# Altium PCB USB_Control.PcbDoc (part 2 of 2)
Units mil, origin at the board's own origin, x right, y up, seen from the top; angles counter-clockwise.
Board outline 3609 x 2250 mil, 4 copper layers (Component Side, Ground Plane, Power Plane, Solder Side), stack 26.634 mil thick; 208 components, 136 nets, 707 pads, 296 vias.
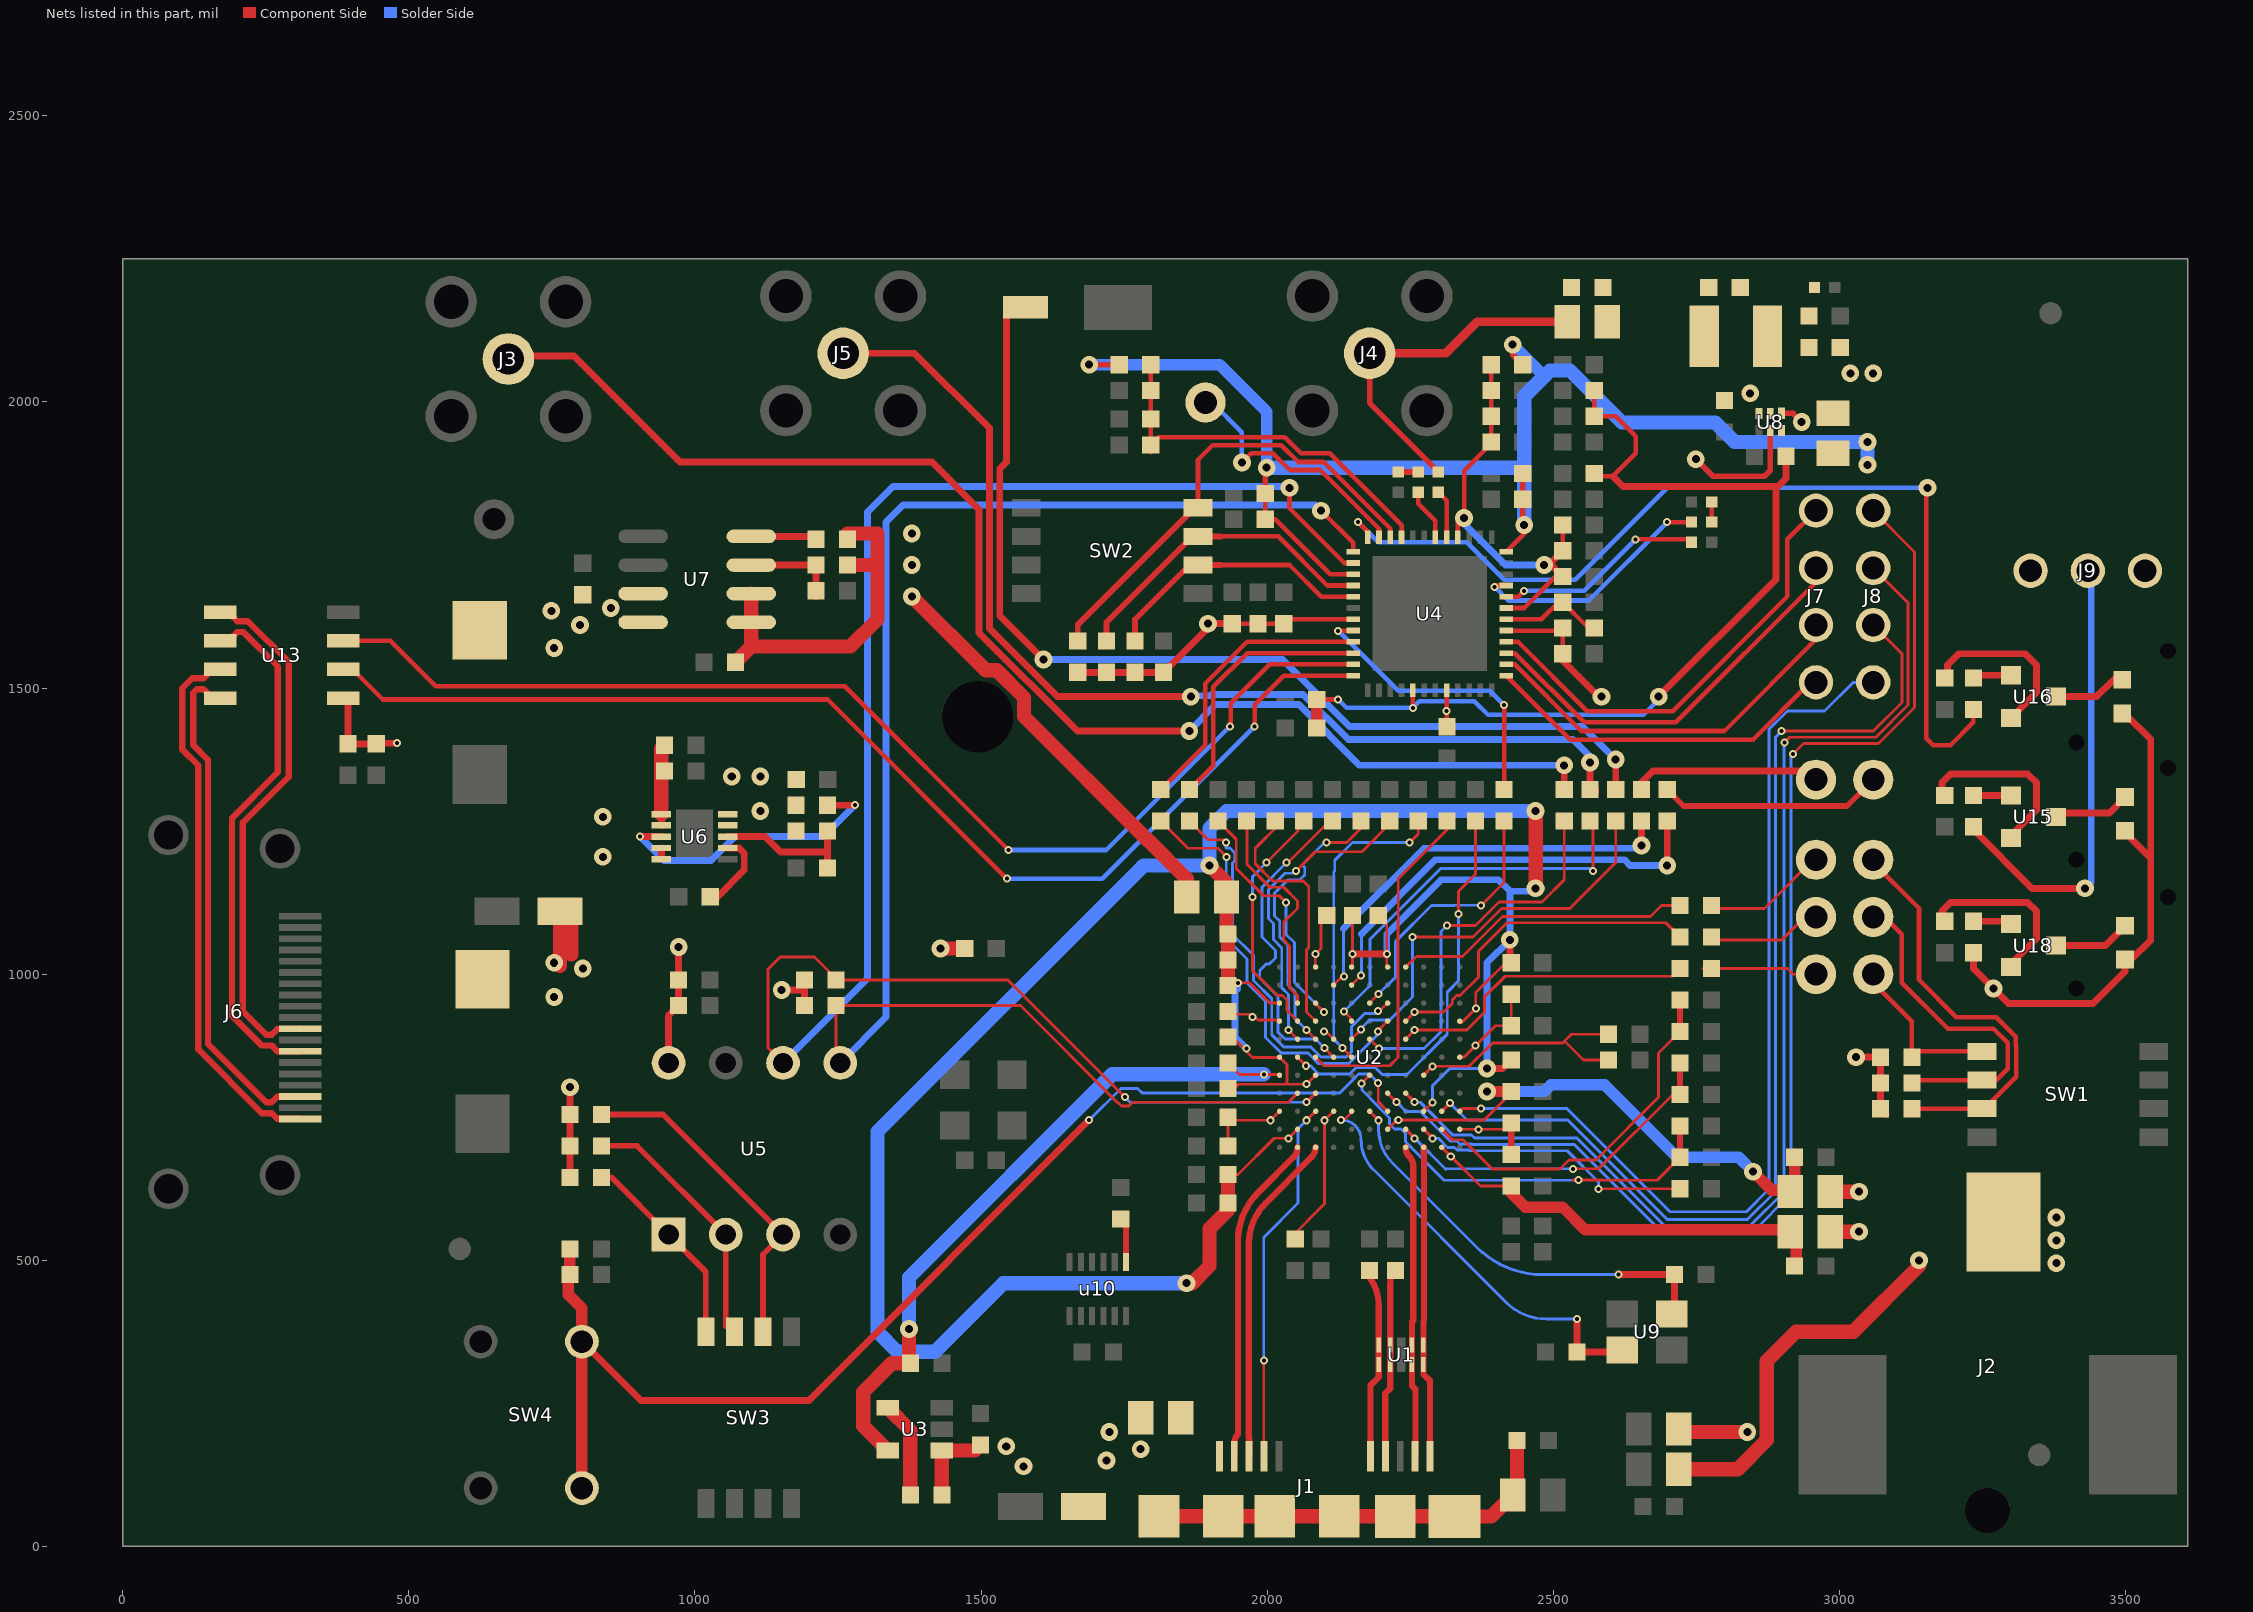
[diagram p4: the nets of this part, all layers, seen from the top]

## Via types
v1: diameter 31, hole 14, Component Side to Solder Side, tented both sides, 160 vias
v2: diameter 14, hole 7, Component Side to Solder Side, tented both sides, 109 vias
v3: diameter 14, hole 7, Component Side to Solder Side, 14 vias
v4: diameter 19.68, hole 7.87, Component Side to Solder Side, tented both sides, 13 vias

## Nets (pads, with @x,y where several pads share a name; then routed paths per layer and width w, separated by ;. In a path a pad name is that pad's centre, name@x,y a point inside that pad or via, vN(x,y) a via of type N, cw(c..) or ccw(c..) an arc to the next point about the centre after c; other vN are vias at no path point) (continued)
NetC1_1: C1.1 J1.11 L2.2 | length 726.3
  Component Side w25: J1.11@1811,52.75 J1.11@1923.5,52.75 J1.11@2013.5,52.75 J1.11@2126,52.75 J1.11@2326.5,52.75 ; J1.11@2327,52.25 2391.41,52.25 L2.2@2429.16,90 2436.5,97.34 C1.1@2436.5,180
NetC21_0: C21.0 U4.41 | length 84.5
  Component Side w8: C21.0@2299,1842.28 2313.53,1827.76 2313.53,1810.59 ; 2313.5,1789.44 2313.5,1810.56 ; U4.41@2313.53,1763.86 2313.53,1789.41
NetC21_1: C21.1 J4.1 L12.1 R56.0 | length 627.2
  Component Side w10: J4.1@2179,2085 2179,1997.96 2295.2,1881.76 C21.1@2303.04,1881.76
  Component Side w15: J4.1@2179,2085 2312,2085 2367,2140 L12.1@2524.16,2140
NetC22_0: C22.0 U4.42 | length 90.8
  Component Side w8: C22.0@2264,1842.28 2264,1822.28 2293.84,1792.44 U4.42@2293.84,1763.86
NetC22_1: C22.1 R34.0 | length 35
  Component Side w10: R34.0@2234,1877.72 C22.1@2269,1877.72
NetC26_0: C26.0 U4.32 | length 367.1
  Component Side w8: U4.32@2417.86,1659.53 2438.53,1659.53 v2(2449,1670) ; v2(2644,1760) 2736.28,1760 C26.0@2741.28,1755
  Solder Side w8: v2(2449,1670) 2554,1670 v2(2644,1760)
NetC27_0: C27.0 U4.33 | length 432
  Component Side w8: v2(2397.39,1676.82) 2399.79,1679.21 U4.33@2417.86,1679.21 ; v2(2699,1790) C27.0@2741.28,1790
  Solder Side w8: v2(2397.39,1676.82) 2421.21,1653 2562,1653 v2(2699,1790)
NetC27_1: C27.1 R35.0 | length 35
  Component Side w8: C27.1@2776.72,1790 R35.0@2776.72,1825
NetC73_1: C73.1 U6.7 | length 140.5
  Component Side w12: C73.1@1026.81,1135.31 1039.31,1135.31 1086.12,1182.12 1086.12,1211.43 1076.91,1220.63 U6.7@1057.38,1220.63
NetC76_0: C76.0 C77.0 L11.1 L13.2 R57.1
NetC78_1: C78.1 R58.0 SW4.2 U2.C5 | length 2165.4
  Component Side w5: v2(2194,810) 2194,777.01 U2.C5@2210.5,760.51
  Component Side w12: SW4.2@802.58,357.95 905.53,255 1199,255 v2(1689,745)
  Component Side w20: R58.0@779,472.5 779,440 802.58,416.42 SW4.2@802.58,357.95 SW4.2@802.58,102.05 ; R58.0@781.5,475 C78.1@781.5,520
  Solder Side w5: v2(1689,745) 1744.5,800.5 1773.5,800.5 1781.74,792.26 2126.81,792.26 2149.5,814.94 2149.5,815.42 2159.58,825.5 2178.5,825.5 v2(2194,810)
NetJ1_1: J1.1 L1.1
NetJ3_1: J3.1 R11.1 | length 2330.7
  Component Side w12: J3.1@689,2080 789,2080 974,1895 1414,1895 1496.63,1812.37 1496.63,1596.57 1668.2,1425 v1(1864,1425) ; R11.1@2519,1325 v1(2519,1365)
  Solder Side w12: v1(1864,1425) 1910,1471 2055.22,1471 2161.22,1365 v1(2519,1365)
NetJ5_1: J5.1 R15.1 | length 1872.2
  Component Side w12: J5.1@1259,2085 1384,2085 1514.63,1954.37 1514.63,1604.02 1633.65,1485 v1(1866.5,1485) ; v1(2564,1370) 2564,1332.5 2574,1322.5 R15.1@2574,1317.5
  Solder Side w12: v1(1866.5,1485) 1867.96,1486.46 1900,1486.46 1902.54,1489 2062.67,1489 2141.67,1410 2534,1410 2564,1380 v1(2564,1370)
NetJ6_1: J6.1 U13.7 | length 953
  Component Side w11: U13.7@170.72,1532.5 153.98,1532.5 147.67,1526.19 147.67,1523.44 141.23,1517 121.73,1517 104.16,1499.43 104.16,1392.65 132,1364.81 132,868.49 243.26,757.23 260.24,757.23 270.02,747.45 309.91,747.45 J6.1@310.32,747.05
NetJ6_3: J6.3 U13.8 | length 890
  Component Side w11: U13.8@170.72,1482.5 153.98,1482.5 147.67,1488.81 147.67,1491.56 141.23,1498 129.6,1498 123.16,1491.56 123.16,1400.52 149,1374.68 149,878.36 251.13,776.23 260.24,776.23 270.02,786.01 309.91,786.01 J6.3@310.32,786.42
NetJ6_7: J6.7 U13.6 | length 921.7
  Component Side w11: U13.6@170.72,1582.5 187.45,1582.5 193.76,1588.81 193.76,1591.56 200.2,1598 210.76,1598 271,1537.76 271,1352.79 191,1272.79 191,927.6 243.26,875.34 260.24,875.34 270.02,865.56 309.91,865.56 J6.7@310.32,865.16
NetJ6_9: J6.9 U13.5 | length 921.7
  Component Side w11: U13.5@170.72,1632.5 187.45,1632.5 193.76,1626.19 193.76,1623.44 200.2,1617 218.63,1617 290,1545.63 290,1344.92 210,1264.92 210,935.47 251.13,894.34 260.24,894.34 270.02,904.12 309.91,904.12 J6.9@310.32,904.53
NetJ7_1: J7.1 U4.28 | length 795.1
  Component Side w8: U4.28@2417.86,1580.79 2438.21,1580.79 2559.5,1459.5 2708.5,1459.5 2909,1660 2909,1760 J7.1@2959,1810
NetJ7_2: J7.2 U4.27 | length 717.8
  Component Side w8: U4.27@2417.86,1561.1 2432.9,1561.1 2554,1440 2714,1440 2959,1685 J7.2@2959,1710
NetJ7_3: J7.3 U4.26 | length 680.6
  Component Side w8: U4.26@2417.86,1541.42 2432.58,1541.42 2549,1425 2799,1425 2959,1585 J7.3@2959,1610
NetJ7_4: J7.4 U4.25 | length 646.5
  Component Side w8: U4.25@2417.86,1521.73 2529.59,1410 2849,1410 2947.27,1508.27 2947.27,1521.73 J7.4@2959,1510
NetJ8_1: J8.1 U2.D5 | length 2222.5
  Component Side w5: U2.D5@2210.5,792.01 v2(2226.24,776.26) ; v2(2919,1385) 2937,1403 3068.11,1403 3131,1465.89 3131,1738 J8.1@3059,1810
  Solder Side w5: v2(2226.24,776.26) 2226.69,776.26 2242.69,760.26 2267.28,760.26 2278.02,749.52 2278.5,749.52 2319.75,708.27 2331.71,708.27 2336.48,703.5 2357.04,703.5 2358.02,702.52 2536.48,702.52 2689.36,549.64 2848.64,549.64 2915.5,616.5 2915.5,1381.5 v2(2919,1385)
NetJ8_2: J8.2 U2.D4 | length 2075.3
  Component Side w5: U2.D4@2241.99,792.01 v2(2257.74,776.26) ; v2(2904,1405) 2913,1414 3063.56,1414 3120,1470.44 3120,1649 J8.2@3059,1710
  Solder Side w5: v2(2257.74,776.26) 2267.32,776.26 2273.5,770.08 2273.5,769.6 2282.58,760.52 2283.05,760.52 2324.3,719.27 2356.82,719.27 2362.58,713.52 2541.04,713.52 2693.91,560.64 2844.09,560.64 2903,619.56 2903,1404 v2(2904,1405)
NetJ8_3: J8.3 U2.C2 | length 1889.5
  Component Side w5: U2.C2@2304.98,760.51 2319,774.53 v2(2319,775) ; v2(2899,1425) 3059,1425 3109,1475 3109,1560 J8.3@3059,1610
  Solder Side w5: v2(2319,775) 2349,745 2525.11,745 2698.47,571.64 2839.53,571.64 2888,620.11 2888,1414 v2(2899,1425)
NetJ8_4: J8.4 U2.C1 | length 1652.7
  Component Side w5: U2.C1@2336.48,760.51 2340.97,765 v2(2374,765)
  Solder Side w5: v2(2374,765) 2524,765 2704,585 2837.33,585 2877,624.67 2877,1428 2909,1460 2974,1460 3024,1510 J8.4@3059,1510
NetJ9_2: J9.2 L11.2 R60.1 | length 804.3
  Component Side w12: R60.1@3234,1257.5 3234,1252.79 3336.79,1150 v1(3429,1150)
  Solder Side w12: v1(3429,1150) 3440,1161 3440,1699 J9.2@3434,1705
  other v1: 3019,2050 3059,2050
NetK1_1: K1.1 R3.1 SW1.1 | length 299.6
  Component Side w8: K1.1@3059,1000 3059,985 3126.5,917.5 R3.1@3126.5,855 3136.5,865 SW1.1@3249,865
NetK2_1: K2.1 R2.1 SW1.2 | length 574.6
  Component Side w5: R2.1@3126.5,810 R2.1@3131.5,815
  Component Side w8: K2.1@3079,1090 3089,1090 3109,1070 3109,985 3189,905 3269,905 3294,880 3294,835 3274,815 SW1.2@3249,815 R2.1@3131.5,815
NetK3_1: K3.1 R1.1 SW1.3 | length 749.3
  Component Side w8: K3.1@3059,1220 3059,1195 3139,1115 3139,990 3204,925 3274,925 3308,891 3308,876 3309,875 3309,820.9 3253.1,765 SW1.3@3249,765 R1.1@3126.5,765
NetL5_1: L5.1 U8.2
NetL12_2: L12.2 L13.1 R56.1 R57.0
NetR4_1: R4.1 U2.C8 | length 254.9
  Component Side w5: R4.1@2039,537.5 2100.26,598.76 v2(2100.26,744.76) U2.C8@2116.01,760.51
NetR5_1: R5.1 U2.B3 | length 498.1
  Component Side w5: U2.B3@2273.49,729.02 v2(2289.24,713.27) ; v2(2579,625) R5.1@2721.5,625
  Solder Side w5: v2(2289.24,713.27) 2299.2,713.27 2315.19,697.27 2327.15,697.27 2331.92,692.5 2352.48,692.5 2353.47,691.52 2524.4,691.52 2579,636.92 v2(2579,625)
NetR6_0: R6.0 U2.L4 | length 524
  Component Side w5: U2.L4@2241.99,1012.48 2260.69,1031.18 2341.3,1031.18 2411.11,1101 2670,1101 2689,1120 R6.0@2721.5,1120
NetR7_0: R7.0 U2.H4 | length 591
  Component Side w5: U2.H4@2241.99,917.99 v2(2257.74,933.74) 2307.94,933.74 2323.26,949.06 2323.26,954.97 2331,962.71 2336.91,962.71 2369,994.8 2369,1040 2419,1090 2696.5,1090 R7.0@2721.5,1065
NetR8_0: R8.0 U2.G4 | length 546.4
  Component Side w5: U2.G4@2241.99,886.5 v2(2257.74,902.24) 2348.64,902.24 2379.97,933.58 2379.97,960.49 2415.98,996.5 2708,996.5 R8.0@2721.5,1010
NetR9_0: R9.0 U2.H5 | length 754.9
  Component Side w5: R9.0@1814,1267.5 1861.5,1220 1914,1220 1928.5,1205.5 v2(1928.5,1205) v2@1929,1205 ; v2(2194,900) v2@2194,901.5 ; v2@2194,905 v2@2194,901.5 ; U2.H5@2210.5,917.99 v2@2194,901.5
  Solder Side w5: v2(1928.5,1205) 1928.5,1062.5 1964.5,1026.5 1964.5,984.97 1997,952.47 1997,889.48 2024.44,862.04 2071.5,862.04 2089.28,844.25 2142.73,844.25 2194,895.51 v2(2194,900)
NetR9_1: R9.1 U4.9 | length 506.1
  Component Side w8: R9.1@1814,1322.5 1892,1400.5 1892,1508 1964.79,1580.79 U4.9@2150.14,1580.79
NetR10_0: R10.0 U2.J5 | length 745.2
  Component Side w5: R10.0@1864,1267.5 1896.5,1235 1923,1235 v2(1928,1230) ; v2@2194,935 v2(2194,935.5) 2196.51,935.5 U2.J5@2210.5,949.49
  Solder Side w5: v2@1928,1235 v2(1928,1230) 1928,1220.5 1934.92,1220.5 1944,1211.42 1944,1198.58 1939.5,1194.08 1939.5,1069.5 1976,1032.99 1976,989.02 2008,957.03 2008,894.04 2029,873.04 2076.05,873.04 2093.84,855.25 2138.18,855.25 2147.26,864.33 2147.26,908.18 2170.08,931 2189.5,931 v2(2194,935.5)
NetR10_1: R10.1 U4.10 | length 465.6
  Component Side w8: R10.1@1864,1322.5 1906,1364.5 1906,1502.2 1964.9,1561.1 U4.10@2150.14,1561.1
NetR11_0: R11.0 U2.G6 | length 674
  Component Side w5: U2.G6@2179,886.5 v2(2195.5,870) ; v2(2314,1085) 2364,1085 2405,1126 2480,1126 2519,1165 R11.0@2519,1267.5
  Solder Side w5: v2(2195.5,870) 2274,870 2303.5,899.5 2303.5,1074.5 v2(2314,1085)
NetR12_0: R12.0 U2.D9 U4.2 U5.6 | length 3234.5
  Component Side w5: U5.6@1154,845 1127.5,871.5 1127.5,1008.5 1149,1030 1209,1030 1249,990 1546.52,990 v2(1751.52,785) ; v2(2068.76,776.26) U2.D9@2084.51,792.01
  Component Side w8: v1(2039,1850) 2039,1814 2134.42,1718.58 U4.2@2150.14,1718.58
  Solder Side w5: v2(1751.52,785) 1760.26,776.26 v2(2068.76,776.26)
  Solder Side w12: U5.6@1154,845 1301.5,992.5 1301.5,1807.5 1346.5,1852.5 2039,1852.5 2046.5,1852.5 2044,1850 v1(2039,1850)
NetR13_0: R13.0 U2.G7 | length 709.9
  Component Side w5: U2.G7@2147.5,886.5 v2(2164,903) v2@2164,905 ; v2(2254,1065) 2359.56,1065 2409.56,1115 2432.08,1115 2432.58,1114.5 2528.5,1114.5 2609,1195 R13.0@2609,1252.5
  Solder Side w5: v2@2164,905 2179,920 2214,920 2254,960 v2(2254,1065)
NetR13_1: pad.0 R13.1 | length 1778.9
  Component Side w12: pad.0@1551.5,2164.5 1544.63,2157.63 1544.63,1895.02 1532.63,1883.02 1532.63,1626.37 v1(1609,1550) ; R13.1@2609,1322.5 v1(2609,1375)
  Solder Side w12: v1(1609,1550) 2027.13,1550 2144.13,1433 2551,1433 v1(2609,1375)
NetR14_0: R14.0 U2.D10 U4.1 U5.5 | length 2830.7
  Component Side w5: U5.5@1246.5,852.5 R14.0@1246.5,945 1569,945 1737.74,776.26 1738.34,776.26 1745.1,769.5 1757.94,769.5 1764.7,776.26 2037.27,776.26 U2.D10@2053.02,792.01
  Component Side w8: v1(2094,1810) 2150.14,1753.86 U4.1@2150.14,1738.27
  Solder Side w12: U5.5@1254,845 1334,925 1334,1790 1364,1820 2084,1820 v1(2094,1810)
NetR15_0: R15.0 U2.H7 | length 701
  Component Side w5: v2(2134,935) 2147.5,921.49 U2.H7@2147.5,917.99 ; v2(2569,1180) 2569,1260 R15.0@2576.5,1267.5
  Solder Side w5: v2(2134,935) 2179.5,980.5 2179.5,1061.01 2303.49,1185 2564,1185 v2(2569,1180)
NetR16_0: R16.0 U2.K7 | length 771.3
  Component Side w5: U2.K7@2147.5,980.98 v2(2164,997.48)
  Component Side w12: v1(2699,1190) R16.0@2699,1267.5
  Solder Side w5: v2(2164,997.48) 2164.5,997.98 2164.5,1070.5
  Solder Side w12: 2164.5,1070.5 2294,1200 2624,1200 2634,1190 v1@2704,1190
NetR16_1: R16.1 TP3.1 | length 390.9
  Component Side w10: R16.1@2699,1322.5 2727.5,1294 3013,1294 TP3.1@3059,1340
NetR17_0: R17.0 U2.K8 | length 727.4
  Component Side w5: U2.K8@2116.01,980.98 v2@2134,998.98
  Component Side w12: v1(2654,1225) R17.0@2654,1267.5
  Solder Side w5: 2133.5,1079.5 2133.5,999.48 v2@2134,998.98
  Solder Side w12: 2133.5,1079.5 2274,1220 v1@2654,1220
  other v2: 2134,996
NetR17_1: R17.1 TP4.1 | length 341.5
  Component Side w12: R17.1@2655.25,1321.25 2655.25,1336.25 2674,1355 2959,1355 TP4.1@2959,1340
NetR18_0: R18.0 U2.J6 | length 466.7
  Component Side w5: U2.J6@2179,949.49 v2(2194.75,965.24) ; v2(2374,1120) 2414,1160 R18.0@2414,1267.5
  Solder Side w5: v2(2194.75,965.24) 2224.5,994.99 2224.5,1057.42 2287.08,1120 2327.08,1120 2327.58,1120.5 2373.5,1120.5 v2(2374,1120)
NetR18_1: R18.1 U4.8 | length 517.7
  Component Side w8: v2(2124,1600) 2149.67,1600 U4.8@2150.14,1600.47 ; R18.1@2414,1322.5 v2(2414,1470)
  Solder Side w8: v2(2124,1600) 2229,1495 2389,1495 v2(2414,1470)
NetR19_0: R19.0 U2.H9 | length 437.2
  Component Side w5: R19.0@2019,1260 1979,1220 1979,1193.08 2009.08,1163 2063,1163 2072.5,1153.5 2072.5,1046.35 2068.5,1042.35 2068.5,934 U2.H9@2084.51,917.99
NetR20_0: R20.0 U2.H10 | length 423.8
  Component Side w5: v2(1974,1135) 1974,1006.58 2017.87,962.71 2027,962.71 2034.74,954.97 2034.74,936.26 U2.H10@2053.02,917.99 ; v2@1995.92,1195 v2(1999,1195) 2054,1250 R20.0@2054,1267.5
  Solder Side w5: v2(1974,1135) 1974,1170 v2(1999,1195)
NetR21_0: R21.0 U2.F8 | length 571.8
  Component Side w5: v2(2034,1195) 2036.5,1195 R21.0@2109,1267.5 ; v2(2100.26,870.75) U2.F8@2116.01,855
  Solder Side w5: v2(2034,1195) 1991,1152 1991,1064.92 2014.5,1041.42 2014.5,1028.58 2003.42,1017.5 1998.08,1017.5 1987,1006.42 1987,993.58 2019,961.58 2019,898.59 2030.85,886.74 2084.26,886.74 v2(2100.26,870.75)
NetR22_0: R22.0 U2.G9 | length 511.8
  Component Side w5: v2(2068.76,902.24) U2.G9@2084.51,886.5 ; v2(2104,1230) 2139,1230 2164,1255 R22.0@2164,1267.5
  Solder Side w5: v2(2068.76,902.24) 2048.27,922.74 2048.27,969.17 2036.5,980.94 2036.5,1050.53 2022,1065.03 2022,1092.86 2013,1101.86 2013,1141.56 2035.94,1164.5 2056.48,1164.5 2065.56,1173.58 2065.56,1186.42 2061.02,1190.96 2100.06,1230 v2(2104,1230)
NetR23_0: R23.0 U2.G10 | length 542.5
  Component Side w5: v2(2037.27,902.24) U2.G10@2053.02,886.5 ; v2(2050.06,1180) 2084.06,1214 2165.5,1214 R23.0@2219,1267.5
  Solder Side w5: v2(2037.27,902.24) 2037.27,964.62 2025.5,976.39 2025.5,1045.98 2011,1060.48 2011,1088.31 2002,1097.31 2002,1147.44 2030.85,1176.3 v2@2045.3,1176.3
NetR24_0: R24.0 U2.F7 | length 555.2
  Component Side w5: v2(2131.76,870.75) U2.F7@2147.5,855 ; v2(2249,1230) 2264,1245 R24.0@2264,1267.5 R24.0@2274,1267.5
  Solder Side w5: v2(2131.76,870.75) 2116.26,886.25 2116.26,1178.31 2118,1180.06 2118,1199 2149,1230 v2(2249,1230)
NetR25_0: R25.0 U2.F9 | length 604.7
  Component Side w5: U2.F9@2084.51,855 2099.51,840 2214.2,840 2228.77,854.57 2228.77,1094.77 2229,1095 2229,1167.5 2314,1252.5 R25.0@2314,1267.5
NetR26_0: R26.0 R30.1 U2.B2 | length 645.3
  Component Side w5: U2.B2@2304.98,729.02 2323.26,710.74 2341.96,710.74 2393.2,659.5 2511.58,659.5 2527.58,675.5 2574.5,675.5 2684,785 2684,862.5 R26.0@2721.5,900
  Component Side w10: R26.0@2721.5,900 R30.1@2721.5,955
NetR27_0: R27.0 R31.1 U2.B4 | length 618
  Component Side w5: U2.B4@2241.99,729.02 v2(2257.74,713.27) ; v2(2534,660) 2579,660 2709,790 R27.0@2721.5,790
  Component Side w10: R27.0@2721.5,790 R31.1@2721.5,845
  Solder Side w5: v2(2257.74,713.27) 2312.26,658.75 2313.51,660 v2(2534,660)
NetR28_0: R28.0 R32.1 U2.E6 | length 759.1
  Component Side w5: v2@2165.5,810 U2.E6@2179,823.5 ; v2(2544,640) 2535,640 2534.5,640.5 2570.42,640.5 2570.92,640 2572.08,640 2572.58,640.5 2585.42,640.5 2585.92,640 2681.5,640 R28.0@2721.5,680
  Component Side w10: R28.0@2721.5,680 R32.1@2721.5,735
  Solder Side w5: v2@2165.5,810 2165.5,797.43 2180.25,782.68 2180.25,782.19 2213.5,748.94 2213.5,738.58 2222.58,729.5 2234,729.5 2241.74,721.76 2241.74,707.34 2309.09,640 v2(2544,640)
  other v2: 2165,809
NetR29_0: R29.0 U2.F10 | length 705.5
  Component Side w5: U2.F10@2053.02,855 v2(2068.02,840) ; v2(2334,1105) 2334,1145 2364,1175 R29.0@2364,1267.5
  Solder Side w5: v2(2068.02,840) 2075.41,840 2089.91,825.5 2144.02,825.5 2155.02,836.5 2189.42,836.5 2200.92,825 2244.56,825 2314.5,894.94 2314.5,968.58 2334.5,988.58 2334.5,1010.5 2334,1011 v2(2334,1105)
NetR33_0: R33.0 U3.4 | length 168.9
  Component Side w25: U3.4@1336.76,242.4 1376.5,202.66 R33.0@1376.5,90
NetR47_0: R47.0 SW3.8 U5.1 | length 360.8
  Component Side w10: R47.0@836.5,645 854,645 U5.1@954,545 1019,480 SW3.8@1019,370
NetR48_0: R48.0 SW3.7 U5.2 | length 462.9
  Component Side w10: R48.0@836.5,700 899,700 U5.2@1054,545 1054,390 ; 1054,385 1054,390 ; SW3.7@1069,375 1054,390
NetR49_0: R49.0 SW3.6 U5.3 | length 594
  Component Side w10: R49.0@836.5,755 944,755 U5.3@1154,545 1119,510 SW3.6@1119,375 SW3.6@1119,370
NetR50_0: R50.0 U6.3 | length 515.1
  Component Side w12: v2(904.31,1240.31) U6.3@941.24,1240.31 ; R50.0@1234.31,1297.81 1236.81,1295.31 v2(1279.31,1295.31)
  Solder Side w12: v2(904.31,1240.31) 945.84,1198.79 1028.05,1198.79 1069.57,1240.31 1224.31,1240.31 v2(1279.31,1295.31)
NetR51_0: R51.0 U7.8 | length 108
  Component Side w12: U7.8@1098.49,1765 R51.0@1206.5,1765
NetR52_0: R52.0 R54.1 U7.7 | length 168
  Component Side w12: U7.7@1098.49,1715 R52.0@1211.5,1715 R54.1@1211.5,1660
NetR53_0: R53.0 R55.1 U6.8 | length 240.1
  Component Side w12: U6.8@1057.38,1240.31 1122.81,1240.31 1149.81,1213.31 1231.31,1213.31 ; R55.1@1231.81,1185.31 R53.0@1231.81,1240.31
NetR59_0: R59.0 u10.7 | length 69.5
  Component Side w10: u10.7@1753.21,502.24 R59.0@1753.21,571.71
NetR60_0: R60.0 U15.B | length 55.7
  Component Side w12: R60.0@3234,1312.5 U15.B@3289.73,1312.5
NetR61_0: R61.0 U16.B | length 60.7
  Component Side w12: R61.0@3238.9,1522.4 U16.B@3299.63,1522.4
NetR61_1: R61.1 U4.48 | length 1701.5
  Component Side w8: v2(2159,1790) 2175.73,1773.27 U4.48@2175.73,1763.86 ; v1@3151.5,1847.5 3151.5,1412.5 3164,1400 3194,1400 3234,1440 R61.1@3234,1462.5
  Component Side w12: v1@3151.5,1847.5 v1(3154,1850)
  Solder Side w8: v2(2159,1790) 2194,1755 2349,1755 2414.5,1689.5 2538.5,1689.5 2699,1850 v1(3154,1850)
NetR62_0: R62.0 U2.J9 | length 448.3
  Component Side w5: R62.0@1914,1267.81 1946,1235.81 1946,1184.92 1989.5,1141.42 1989.5,1140.5 1993,1137 2021,1137 v3(2033,1125) ; U2.J9@2084.51,949.49 2084.51,948.99 2099,934.5 v3(2099,934)
  Solder Side w5: v3(2033,1125) 2033,1069.59 2047.5,1055.09 2047.5,985.5 v3(2099,934)
NetR63_0: R63.0 U18.B | length 60.7
  Component Side w12: R63.0@3229,1092.5 R63.0@3234,1092.5 U18.B@3289.73,1092.5
NetR64_1: R64.1 U18.E | length 310.7
  Component Side w12: R64.1@3179,1087.5 3179,1110 3194,1125 3329,1125 3344,1110 3344,1061.97 U18.E@3299.63,1017.6
NetR65_1: R65.1 U15.E | length 315.7
  Component Side w12: R65.1@3179,1307.5 3179,1335 3194,1350 3329,1350 3344,1335 3344,1286.97 U15.E@3299.63,1242.6
NetR66_1: R66.1 U16.E | length 294.8
  Component Side w12: R66.1@3189,1527.5 3189,1540 3209,1560 3324,1560 3344,1540 3344,1491.97 U16.E@3299.63,1447.6
NetR67_0: R67.0 U2.J10 | length 388.8
  Component Side w5: R67.0@1964,1267.5 1965,1266.5 1965,1191.52 2004.52,1152 2028.77,1152 2052.77,1128 2052.77,1114.77 2029,1091 2029,1059.5 2039,1049.5 2039,976.3 2053.02,962.28 U2.J10@2053.02,949.49
NetTP2_1: TP2.1 U4.47 | length 454.1
  Component Side w8: v1(1955.85,1894.09) 1972.26,1910.5 2009.56,1910.5 2039.06,1881 2093,1881 2195.42,1778.58 U4.47@2195.42,1763.86
  Solder Side w8: TP2.1@1892,1999 1904,1999 1955.85,1947.15 v1(1955.85,1894.09)
NetU4_11: U4.11 U13.3 | length 2073.5
  Component Side w8: U13.3@385.28,1582.5 467.5,1582.5 547,1503 1262,1503 v3(1548,1217) ; v3(1935,1433) 1936.15,1434.15 1936.15,1473.15 2004.42,1541.42 U4.11@2150.14,1541.42
  Solder Side w8: v3(1548,1217) 1719,1217 v3(1935,1433)
NetU4_12: U4.12 U13.2 | length 2085.2
  Component Side w8: U13.2@385.28,1532.5 402.02,1532.5 454.52,1480 1232,1480 v3(1545,1167) ; v3(1978,1433) 1978,1470.64 2029.09,1521.73 U4.12@2150.14,1521.73
  Solder Side w8: v3(1545,1167) 1712,1167 v3(1978,1433)
NetU11_C: U11.C U15.C | length 132
  Component Side w12: U15.C@3378.37,1281.97 3471.47,1281.97 U11.C@3499,1309.5
NetU12_C: U12.C U16.C | length 132.8
  Component Side w12: U16.C@3378.37,1485 3449,1485 3478.5,1514.5 U12.C@3499,1514.5
NetU14_C: U14.C U18.C | length 134.9
  Component Side w12: U18.C@3378.37,1050 3464.5,1050 U14.C@3499,1084.5
OEN: R39.0 SW2.2 U4.5 | length 481
  Component Side w8: 1919,1715 2039,1715 2094.47,1659.53 U4.5@2150.14,1659.53
  Component Side w10: R39.0@1769,1582.5 1769,1620 1864,1715 1919,1715
OSS_SEL: R38.0 SW2.3 U4.4 | length 561.3
  Component Side w8: 1919,1765 2019,1765 2104.79,1679.21 U4.4@2150.14,1679.21
  Component Side w10: R38.0@1719,1582.5 1719,1615 1869,1765 1919,1765
OTG_ID: J1.4 U2.C9 | length 639.8
  Component Side w5: J1.4@1994,158.25 v2(1994,325) ; v2(2068.76,744.76) U2.C9@2084.51,760.51
  Solder Side w5: v2(1994,325) 1994,540 2054,600 2054,730 v2(2068.76,744.76)
PDN: C30.0 R36.1 U4.30 | length 187.7
  Component Side w8: U4.30@2417.86,1620.16 2479.16,1620.16 2512.75,1653.75 R36.1@2561.5,1605 ; R36.1@2561.5,1600 R36.1@2571.5,1600
PMODE_0: K1.2 R8.1 | length 201.6
  Component Side w5: R8.1@2761.5,1010 R8.1@2776.5,1010 2909,1010 2919,1000 K1.2@2959,1000
PMODE_1: K2.2 R7.1 | length 207.4
  Component Side w5: R7.1@2764,1060 2899,1060 2929,1090 K2.2@2959,1090
PMODE_2: K3.2 R6.1 | length 243.5
  Component Side w5: R6.1@2774,1115 2869,1115 K3.2@2974,1220
SEL: R37.0 SW2.4 U4.46 | length 828.7
  Component Side w8: SW2.4@1879,1815 1879,1899 1904.5,1924.5 2024.5,1924.5 2054,1895 2099,1895 2215.1,1778.9 U4.46@2215.1,1763.86
  Component Side w10: R37.0@1669,1582.5 1669,1610.52 1873.48,1815 SW2.4@1879,1815
SS_D_N: J1.2 U2.A10 | length 578.4
  Component Side w11: J1.2@1942.5,157.75 1942.5,180.56 cw(c1964.69,180.56) 1949,196.25 1949,533.99 cw(c2068,533.99) 1983.85,618.13 2045.79,680.07 ccw(c2028.33,697.52) U2.A10@2053.02,697.52
SS_D_P: J1.3 U2.A9 | length 582.8
  Component Side w11: J1.3@1968.5,157.75 1968.5,189.04 ccw(c1966.79,189.04) 1968,190.25 1968,529.36 cw(c2068,529.36) 1997.29,600.07 2077.28,680.07 ccw(c2059.83,697.52) U2.A9@2084.51,697.52
SS_RX_N: J1.10 U1.5 U1.6 U2.A3 | length 543.7
  Component Side w11: 2273,394 U1.6@2273,352 U1.5@2273,318 2273,301 2284.5,289.5 J1.10@2284.5,157.75 ; U2.A3@2273.49,697.52 2273.49,688.02 ccw(c2275.24,688.02) 2274,686.78 2274,395
SS_RX_P: J1.9 U1.4 U1.7 U2.A4 | length 543.2
  Component Side w11: U2.A4@2241.99,697.52 ccw(c2266.68,697.52) 2249.22,680.07 cw(c2235.27,666.12) 2255,666.12 2255,395 ; 2253,393 U1.7@2253,352 U1.4@2253,318 2253,281 2259,275 J1.9@2259,158.25
SS_TX_N: C2.0 J1.6 U1.1 U1.10 | length 337.7
  Component Side w11: C2.0@2169,482.5 cw(c2106.23,419.73) 2195,419.73 U1.10@2195,352 U1.1@2195,318 2195,296 2180.5,281.5 J1.6@2180.5,157.75
SS_TX_P: C3.0 J1.7 U1.2 U1.9 | length 330.7
  Component Side w11: J1.7@2206.5,157.75 2206.5,267.5 2215,276 U1.2@2215,318 U1.9@2215,352 2215,460.77 cw(c2245.73,460.77) C3.0@2224,482.5
U3RX_VDDQ: C54.1 C55.1 L9.2 U2.A2 | length 726.8
  Component Side w5: U2.A2@2304.98,697.52 v2(2320.73,681.77) 2372.5,630 C54.1@2426.5,630
  Component Side w20: C54.1@2426.5,630 2426.5,617.5 2451,593 2516,593 2555.5,553.5 2907.66,553.5 L9.2@2909.16,555 ; C55.1@2924.16,490 L9.2@2924.16,545
U3TX_VDDQ: C56.1 C57.1 L10.2 U2.B5 | length 975.3
  Component Side w5: U2.B5@2210.5,729.02 2222.54,741.06 2224.42,741.06 2228.86,745.5 2379.5,745.5 2426.5,792.5 C56.1@2426.5,795 C56.1@2426.5,805
  Component Side w20: v1(2384,795) C56.1@2426.5,795 ; v1(2849,655) 2881.5,622.5 2916.34,622.5 2921.5,627.66 C57.1@2921.5,685
  Solder Side w20: v1(2384,795) 2484,795 2495.5,806.5 2589.78,806.5 2716.28,680 2824,680 v1(2849,655)
  other v2: 2229,745
USB3_VBUS: C5.1 C69.1 U2.E11 U3.5 | length 1240.3
  Component Side w5: C69.1@1931.5,845 1951.5,825 v2(1994,825) 2020.02,825 U2.E11@2021.52,823.5
  Component Side w25: U3.5@1336.76,167.6 1294,210.35 1294,270 1344,320 C5.1@1376.5,320 1374,322.5 v1(1374,380)
  Solder Side w25: v1(1374,380) 1374,470 1729,825 v2(1994,825)
V1P2: C72.+ L6.1 L7.1 L9.1 L10.1 R51.1 R52.1 U7.5 U7.6 | length 2115.7
  Component Side w25: C72.+@1071,1545 1098.49,1572.49 ; U7.6@1098.49,1665 U7.5@1098.49,1615 1098.49,1572.49 ; R52.1@1266.5,1715 1314,1715 ; R51.1@1266.5,1770 1319,1770 1319,1620 1271.49,1572.49 1098.49,1572.49 ; v1(1379,1660) 1508,1531 1527.55,1531 1575,1483.55 1575,1450.34 1791.34,1234 1792,1234 1859.16,1166.84 L6.1@1859.16,1135 ; L7.1@2718.84,135 2822.08,135 2873,185.92 2873,324 2924,375 3024,375 3139,490 v1(3139,500) ; L9.1@2983.84,550 v1(3034,550) ; L10.1@2983.84,620 v1(3034,620)
  other v1: 1379,1715 1379,1770
V5P0: C4.1 C33.1 C34.1 C35.1 C36.1 C67.+ C68.+ C70.1 J9.3 L1.2 R33.1 U3.1 U6.1 U6.2 U6.4 U6.5 U7.3 U7.4 | length 475.6
  Component Side w12: U6.5@941.24,1200.94 U6.4@941.24,1220.63 ; U6.2@941.24,1260 U6.1@941.24,1279.68
  Component Side w25: v1@764.12,1014.88 C33.1@764.12,1110 784,1090.12 784,1035 ; U6.1@941.24,1279.68 941.24,1394.24 C67.+@947,1400 ; R33.1@1431.24,90.26 U3.1@1431.24,167.6 C4.1@1489.1,167.6
  other v1: 1574,140 1719,150 1779,170 1544,175 1724,200 754,960 804,1010 754,1020 839,1205 839,1275 754,1570 799,1610 749,1635 853,1640
V12P0: J2.1 J9.1
  other v1: 3379,495 3379,535 3379,575
VDD: C39.1 C40.1 C41.1 C42.1 C43.1 C44.1 C45.1 C46.1 C47.1 C48.1 C49.1 L6.2 U2.B10 U2.C3 U2.E9 U2.F11 U2.H1 U2.J11 U2.L5 U2.L7 | length 4978.8
  Component Side w5: C41.1@1931.5,650 1949,650 2012.27,713.27 v2(2037.27,713.27) U2.B10@2053.02,729.02 ; C49.1@1931.5,790 1949.26,807.76 v2(2068.76,807.76) U2.E9@2084.51,823.5 ; C46.1@1939,890 1974.5,854.5 2021.02,854.5 U2.F11@2021.52,855 2034.74,841.78 2034.74,808.5 ; v2(1949,985) 1969,985 1994,960 2004.51,949.49 U2.J11@2021.52,949.49 ; U2.L7@2147.5,1012.48 2149,1013.98 v2(2149,1035) C40.1@2149,1092.5 ; C45.1@2194,1102.5 2209,1087.5 v2(2209,1035) 2209,1013.98 U2.L5@2210.5,1012.48 ; U2.C3@2273.49,760.51 v2(2289,776.02) ; U2.H1@2336.48,917.99 2339.47,915 v2(2364.47,940) 2364.47,967.97 2424,1027.5 C48.1@2426.5,1030 ; C48.1@2414,1015 C48.1@2416.5,1015
  Component Side w12: C42.1@1931.5,1010 1931.5,992.5 1939,985 v2(1949,985) ; v2(2149,1035) v2(2209,1035) ; v1(2384,835) 2411.5,835 C47.1@2416.5,840 ; C48.1@2424,1022.5 2424,1027.5 v1(2424,1060)
  Component Side w25: v1(1859,460) 1869,460 1899,490 1899,555 1931.5,587.5 C41.1@1931.5,650 ; v1(1899,1190) 1928.84,1160.16 L6.2@1928.84,1135 C39.1@1928.84,1067.66 ; C43.1@1931.5,980 1931.5,1010 C42.1@1931.5,1025 C39.1@1931.5,1065 ; v1(2469,1150) v1(2469,1285)
  Solder Side w5: v2(2289,776.02) 2289,805 2319,835 v1(2384,835)
  Solder Side w12: v2(1949,985) 1948.62,984.62 1948.62,974.62 1944,970 1944,890 v2(1964,870) ; v2(2209,1035) 2209,1070 2304,1165 2404,1165 2424,1145 ; v1(2384,835) 2384,1020 v1(2424,1060) 2424,1145 ; v1@2479,1150 cw(c2466.93,1162.07) 2466.93,1145 2424,1145
  Solder Side w25: 1781.5,1187.5 1319,725 1319,375 1354,340 1419,340 1539,460 v1(1859,460) ; 1784,1190 v1(1899,1190) 1899,1255 1929,1285 v1(2469,1285)
VDDCML0: C11.0 C12.0 C13.0 C16.0 C17.0 C18.0 L4.2 U4.31 U4.40 | length 742.1
  Component Side w8: U4.40@2333.21,1763.86 2333.21,1794.21 2344,1805 2344,1880 C11.0@2390.25,1926.25 ; C11.0@2391.5,1920 2391.5,1926.25 C12.0@2391.5,1975 C13.0@2391.5,2020 L4.2@2391.5,2055 ; U4.31@2417.86,1639.84 2448.84,1639.84 C16.0@2510.25,1701.25 ; C18.0@2516.5,1740 C17.0@2516.5,1780
  Component Side w12: v1(2484,1715) v1@2491.5,1715 ; C16.0@2516.5,1695 2510.25,1701.25 2496.5,1715 v1@2491.5,1715 ; C18.0@2516.5,1740 v1@2491.5,1715
  Solder Side w12: v1@2343.93,1789.92 v1(2343.93,1797.17) 2343.93,1787.38 2416.3,1715 v1(2484,1715)
VDDD: C6.0 C7.0 C14.0 C15.0 C19.0 C20.0 C75.0 L3.1 L4.1 L5.2 R41.1 R42.1 R43.1 U4.3 U4.17 U4.36 U8.6 | length 4216.9
  Component Side w8: C19.0@1996.5,1840 C20.0@1996.5,1795 2014,1795 2110.1,1698.9 U4.3@2150.14,1698.9 ; C6.0@2086.5,1480 v2(2124,1480) ; v2@2254,1465 v2(2254.47,1465.47) U4.17@2254.47,1496.14 ; U4.36@2417.86,1738.27 2449,1769.41 v1(2449,1785) ; R42.1@2571.5,1870 2604,1870 2644,1910 2644,1940 2609,1975 R41.1@2571.5,1975 R43.1@2571.5,2020
  Component Side w10: v1(1689,2065) L3.1@1741.5,2065 ; C19.0@1996.5,1840 1996.5,1882.5 v1(1999,1885) ; v1(2429,2100) 2429,2082.5 L4.1@2446.5,2065 ; C14.0@2446.5,1875 C15.0@2446.5,1830 2446.5,1787.5 v1(2449,1785)
  Component Side w12: 2604,1870 2621.5,1852.5 2892.49,1852.5 ; v1(2684,1485) 2889,1690 2889,1849.01 2906.5,1866.51 C75.0@2906.5,1905
  Component Side w20: C7.0@2086.5,1430 C6.0@2086.5,1480
  Solder Side w8: v2(2124,1480) 2138.53,1465.47 v2(2254.47,1465.47) 2266,1477 2362,1477 2386,1453 2657,1453 2689,1485 v1(2684,1485)
  Solder Side w20: v1(1689,2065) 1917,2065 1999,1983 v1(1999,1885) ; v1(2429,2100) 2484,2045
  Solder Side w25: v1(1999,1885) 2449,1885 ; v1(2449,1785) 2449,2010 2484,2045 2494,2055 2529,2055 2620,1964 2783.08,1964 2817.08,1930 v1(3049,1930) v1(3049,1890)
VDDIO1: C23.0 C24.0 C25.0 C28.0 C29.0 C31.0 C32.0 C37.1 C38.1 C58.1 C59.1 C60.1 C61.1 C62.1 C63.1 C64.1 C65.1 C66.1 C71.+ C74.0 C83.1 C84.1 L8.2 R1.0 R2.0 R3.0 R12.1 R14.1 R36.0 R37.1 R38.1 R39.1 R40.1 R47.1 R48.1 R49.1 R50.1 R53.1 R63.1 U2.B1 U2.C11 U2.E3 U2.F1 U2.G8 U2.H11 U2.L9 U4.7 U4.20 U4.29 U5.8 U6.9 U6.10 U8.1 U8.3 U8.5 U11.A U12.A U13.1 U14.A | length 4001.1
  Component Side w5: C38.1@1931.5,700 1931.5,735 1941.26,744.76 v2(2005.77,744.76) U2.C11@2021.52,760.51 ; C58.1@1931.5,930 1974,930 1984,920 2019.51,920 U2.H11@2021.52,917.99 ; U2.L9@2084.51,1012.48 2084,1012.99 v2(2084,1035) 2094,1045 C59.1@2094,1102.5 ; v2(2099,900) 2102.5,900 U2.G8@2116.01,886.5 ; U2.E3@2273.49,823.5 v2(2289,839.02) 2353.02,839.02 2359.5,845.5 2359.5,846.01 2367.99,854.5 2368.5,854.5 2394,880 2516.5,880 2519.72,883.22 ; U2.B1@2336.48,729.02 v2(2369,729.02) C66.1@2415.52,729.02 ; U2.F1@2336.48,855 2344,855 v2(2364,875) 2399,910 C62.1@2426.5,910 C61.1@2426.5,965 ; 2581.5,895 2531.5,895 2519.72,883.22 ; C64.1@2596.5,850 2552.94,850 2538.94,864 2519.72,883.22
  Component Side w8: C28.0@1939,1612.5 C24.0@1984,1612.5 2026.5,1612.5 2034.16,1620.16 U4.7@2150.14,1620.16 ; C29.0@2313.53,1432.5 v2(2313.53,1460) U4.20@2313.53,1496.14 ; U4.29@2417.86,1600.47 2516.03,1600.47 2516.5,1600 C25.0@2516.5,1555
  Component Side w10: v1(2749,1900) 2779,1870 2869,1870 2879,1880 U8.5@2879,1949.68 ; U8.1@2898.69,1980 2919,1980 v1(2934,1965)
  Component Side w12: U13.1@385.28,1482.5 388.19,1482.5 394,1476.69 C84.1@394,1402.54 C83.1@443,1402.54 444.08,1403.62 478.62,1403.62 v3(479,1404) ; R47.1@781.5,645 R48.1@781.5,700 R49.1@781.5,755 v1(781.5,802.5) ; U5.8@954,845 954,927.5 C32.0@971.5,945 v1(971.5,1047.5) ; v1(1151.5,972.5) 1191.5,972.5 ; R14.1@1191.5,945 1191.5,972.5 ; R12.1@1191.5,990 1191.5,972.5 ; R37.1@1669,1527.5 R38.1@1719,1527.5 R39.1@1769,1527.5 R40.1@1819,1527.5 1896.5,1605 v1(1896.5,1612.5) C28.0@1939,1612.5 ; C65.1@2426.5,685 C66.1@2426.5,740 ; C25.0@2516.5,1555 2516.5,1547.5 2579,1485 v1(2584,1485) ; v1(3029,855) R3.0@3071.5,855 R1.0@3071.5,760 ; R1.0@3076.5,760 R1.0@3081.5,755 ; R63.1@3234,1037.5 3234,1010 3295,949 3443,949 3499,1005 U14.A@3499,1025.5 3509.5,1025.5 3544,1060 3544,1410 3499,1455 3499,1455.5 U12.A@3489.5,1455.5 ; U11.A@3499,1250.5 3499,1247.5 3540.25,1206.25
  Component Side w25: v1(1429,1045) C60.1@1471.5,1045 ; L8.2@2723.84,205 2728.84,200 v1(2839,200)
  other v1: 3269,975 1114.31,1285.31 1064.31,1345.31 1114.31,1345.31 2844,2015
  other v2: 1974,925
VDDPLL: C8.0 C9.0 C10.0 L3.2 U4.45 | length 683.1
  Component Side w8: L3.2@1794.79,2063.29 L3.2@1796.5,2065 C10.0@1796.5,2020 C9.0@1796.5,1970 C8.0@1796.5,1925 ; C8.0@1796.5,1912.5 C8.0@1796.5,1925 ; U4.45@2234.79,1763.86 2234.79,1784.21 2109,1910 2059,1910 2030.5,1938.5 1810,1938.5 C8.0@1796.5,1925
XTALIN: C81.1 U2.C6 U9.2 | length 740.7
  Component Side w5: U2.C6@2179,760.51 v2(2194.75,744.76)
  Component Side w12: v2(2614,475) C81.1@2711.5,475 2711.5,410.69 cw(c2707.31,410.69) U9.2@2707.31,406.5
  Solder Side w5: v2(2194.75,744.76) 2194.75,728.62 ccw(c2277.71,728.62) 2219.05,669.95 2366.5,522.5 ccw(c2481.18,637.18) 2481.18,475 v2(2614,475)
XTALOUT: C80.1 U2.C7 U9.1 | length 732.2
  Component Side w5: v2(2129,745) 2134,745 U2.C7@2149,760
  Component Side w12: v2(2541.5,397.5) C80.1@2541.5,340 2617.19,340 U9.1@2620.69,343.5
  Solder Side w5: v2(2129,745) 2129.86,745 cw(c2129.86,710.86) 2154,735 cw(c2129.86,710.86) 2164,710.86 ccw(c2238.5,710.86) 2185.82,658.18 ; 2189,655 2417.21,426.79 ccw(c2487.92,497.5) 2487.92,397.5 v2(2541.5,397.5)
pads on no net: C26.1 FD1.NC FD2.NC FD3.NC J2.3 J2.HOLE J6.4 J6.6 J6.10 J6.12 J6.13 J6.14 J6.15 J6.16 J6.18 J6.19 LOCK.NC SW1.4 SW1.5 SW3.4 SW3.5 U2.A11 U2.B11 U2.C4 U2.C10 U2.D1 U2.D2 U2.D3 U2.D11 U2.E1 U2.E4 U2.E5 U2.E7 U2.E8 U2.E10 U2.F2 U2.F3 U2.F4 U2.F5 U2.F6 U2.G2 U2.G3 U2.G5 U2.H2 U2.H3 U2.H6 U2.H8 U2.J1 U2.J2 U2.J3 U2.J4 U2.J7 U2.K1 U2.K2 U2.K5 U2.K6 U2.L8 U4.38 U4.39 u10.2 u10.3 u10.4 u10.5 u10.8 u10.9 u10.10 u10.11 V3P3.NC V12P0.NC

## Polygon pours and split planes (outlines as drawn)
V1P2 on Solder Side "Solder Side-No Net" (solid, remove dead copper, pour order 4): 3114,770 3019,675 3019,510 3044,485 3199,485 3309,595 3309,1615 3124,1800 1379,1800 1364,1800 1339,1775 1339,1640 1479,1500 2954,1500 3114,1340
V5P0 on Solder Side "V5 Pour" (solid, pour order 9): 1489,150 1489,355 1569,435 1864,435 1984,315 2369,315 2569,115 3049,115 3469,535 3469,1630 3504,1665 3504,1720 3519,1735 3549,1735 3564,1720 3564,1660 3564,460 3134,30 2614,30 2524,30 2354,200 1874,200 1729,345 1634,345 1619,330 1619,155 1614,150
NetJ9_2 on Solder Side "Coax Pour" (solid, pour order 5): 2994,2065 3004,2075 3064,2075 3099,2075 3134,2075 3464,1745 3464,1695 3444,1675 3424,1675 3104,1995 3054,1995 2994,2055
V12P0 on Solder Side "V12P0Pour" (solid, pour order 10): 3299,1655 3324,1630 3324,570 3269,515 3269,490 3284,475 3379,475 3394,490 3394,1685 3344,1735 3319,1735 3299,1715
V5P0 on Solder Side "Solder Side-No Net" (solid, pour order 6): 1739,220 1214,220 849,585 849,1670 819,1700 751.29,1700 745.44,1695.98 729,1675.19 729,560 1164,125 1754,125 1784,155 1784,165 1784,200 1764,220
VDDIO1 on Power Plane (split plane): 3588.9,20.1 20.1,20.1 20.1,2229.9 3588.9,2229.9
GND on Ground Plane (split plane): 3588.9,20.1 20.1,20.1 20.1,2229.9 3588.9,2229.9

## Keep-outs
Keep-Out Layer:
  lines w10: 0,0 3614,0 3614,2255 0,2255 0,0

## Other copper
Component Side:
  region net GND: 2014,130 2014,250 cw(c2024,250) 2024,260 2084,260 cw(c2084,250) 2094,250 2094,210 cw(c2084,210) 2084,200 2049,200 ccw(c2049,180) 2029,180 2029,130
  region net V5P0: 959.31,1285.31 834.31,1285.31 ccw(c834.31,1275.31) 824.31,1275.31 824.31,1205.31 ccw(c834.31,1205.31) 834.31,1195.31 959.31,1195.31 959.31,1225.31 899.31,1225.31 cw(c899.31,1240.31) 884.31,1240.31 cw(c899.31,1240.31) 899.31,1255.31 959.31,1255.31
  region net VDDIO1: 1039.31,1255.31 1039.31,1360.31 cw(c1044.31,1360.31) 1044.31,1365.31 1194.31,1365.31 ccw(c1194.31,1360.31) 1189.31,1360.31 1189.31,1235 1149.63,1235 1129.31,1255.31
  region net NetC21_1: 2549,2210 2549,2110 2499,2110 2499,2180 2529,2210
  region net NetL12_2: 2789,2210 2789,2060 2669,2060 2619,2110 2574,2110 2574,2185 2569,2190 2569,2210
  region net NetC76_0: 2964,2210 2964,2080 2944,2060 2849,2060 2849,2150 2809,2190 2809,2210
  region net GND: 2984,2210 2984,2135 3019,2135 3044,2160 3044,2200 3034,2210
  region net NetJ9_2: 2989,2110 3019,2110 3079,2050 3079,2040 3069,2030 3019,2030 2989,2060
  region net V12P0: 3224,595 3384,595 3394,585 3394,485 3384,475 3239,475 3224,490
  region net VDDIO1: 2864,1970 2834,1970 2814,1990 2784,1990 2784,2025 2799,2040 2839,2040 2864,2015
  region net VDDD: 2894,1955 2894,1890 2919,1890 2924,1885 3054,1885 3054,1935 2924,1935 2904,1955
  region net GND: 2864,1960 2784,1960 2784,1900 2794,1890 2864,1890
  region net NetL5_1: 2884,1970 2884,1990 2894,2000 2934,2000 2959,1975 2959,1960 3019,1960 3019,2010 2989,2040 2899,2040 2874,2015 2874,1970
  region net NetJ1_1: 1924,130 1924,185 1879,230 1879,255 1874,260 1829,260 1824,255 1824,185 1879,130
  region net GND: 944,1705 789,1705 789,1755 809,1775 944,1775
  region net V5P0: 944,1675 939,1680 789,1680 789,1620 809,1600 944,1600
  region net V1P2: 1309,1780 1324,1795 1404,1795 1419,1780 1419,1635 1409,1625 1309,1625
  region net V5P0: 1689,135 1689,172.5 1746.5,230 1746.5,255 1751.5,260 1796.5,260 1801.5,255 1801.5,185 1736.5,120 1704,120
  region net V5P0: 1484,190 1569,190 1594,165 1594,125 1514,125 1484,155
  region net V5P0: 1689,172.5 1689,45 1729,45 1736.5,52.5 1736.5,120
  region net V5P0: 584,940 819,940 834,955 834,1020 814,1040 584,1040
  region net V5P0: 579,1550 814,1550 829,1565 829,1630 809,1650 579,1650
  region net GND: 579,1395 579,1240 594,1225 649,1225 664,1240 664,1390
  region net GND: 589,780 589,625 604,610 659,610 674,625 674,775
  region net GND: 3079,335 3119,335 3124,330 3124,95 3114,85 3084,85 3079,90
Ground Plane (plane layer: these items are gaps in the copper):
  pour cut-out: 2199,560 2199,455 2244,455 ccw(c2244,460) 2249,460 2249,560
  pour cut-out: 2154,562.5 2154,457.5 2199,457.5 ccw(c2199,462.5) 2204,462.5 2204,562.5

## Silkscreen, mask and mechanical layers (free items; w line width, h text height)
Top Overlay:
  lines w10: 463,1438.31 496.62,1438.31 ; 479.54,1455 480,1423 ; 531,1046.81 564.62,1046.81 ; 531,1662.31 564.62,1662.31 ; 547.54,1063.5 548,1031.5 ; 547.54,1679 548,1647 ; 817.22,1100.69 844.86,1100.69 ; 831.1,1115.19 831.51,1086.59 ; 1004,415 1084,415 ; 1104,35 1184,35 ; 1329,1095 869,1095 804,1160 804,1435 1309,1435 1364,1380 1364,1165 1294,1095 1469,1095 ; 1380,1282 1750,1282 1785,1247 ; 1399,1490 1239,1490 ; 1449,1895 1509,1895 1529,1875 1529,1655 1549,1635 ; 1718.23,108.06 1745.87,108.06 ; 1732.12,122.56 1732.53,93.96 ; 1984,1770 2009,1745 2009,1705 ; 2009,1575 2039,1575 2052,1589.5 ; 2219,1180 2354,1180 ; 2749,1695 2744,1695 ; 2909,1460 2759,1460 2744,1475 2744,1695 ; 2909,1785 2909,1770 2859,1720 2764,1720 2744,1700 2744,1695 ; 3109,1530 3159,1580 3209,1580 3249,1620 3249,1855 3244,1860 3109,1860 ; 3209,2125 3209,1874 3211,1872 ; 3299,1875 3294,1870 3169,1870 3109,1930 3109,2115 3119,2125 3304,2125 ; 3429.73,1009.31 3457.37,1009.31 ; 3429.73,1236.91 3457.37,1236.91 ; 3429.73,1439.31 3457.37,1439.31 ; 3434,1615 3434,1655 ; 3443.62,1023.81 3444.03,995.21 ; 3443.62,1251.41 3444.03,1222.81 ; 3443.62,1453.81 3444.03,1425.21 ; 3474,1760 3474,2215 ; 1239,1490 864,1490 729,1625 729,1860 1269,1860 1324,1805 1324,1575 1239,1490 ; 1512.94,2106.3 1512.94,2214.57 1818.06,2214.57 1818.06,2106.3 1512.94,2106.3 ; 3304,1840 3384,1760 3414,1760 3589,1760 3589,2150 3519,2220 3314,2220 3304,2210 3304,1840
  text "D" at 3564,2195 h30
  text "A" at 3169,2140 h30
  text "B" at 3269,2140 h30
  text "B" at 2374,2100 h30
  text "A" at 1827.9,2057.09 h30
  text "SEL" at 1454,2050 h30
  text "OSS_SEL" at 1454,2005 h30
  text "OEN" at 1454,1960 h30
  text "BISTEN" at 1454,1915 h30
  text "0" at 1619,1855 h30
  text "1" at 1824,1855 h30
  text "C" at 3319,1840 h30
  text "MOSI" at 3129,1800 h30
  text "SCK" at 3129,1760 h30
  text "MISO" at 3129,1720 h30
  text "SSN" at 3129,1680 h30
  text "GPIO0" at 2759,1610 h30
  text "JACK" at 3274,1610 h30
  text "USB" at 3504,1610 h30
  text "GPIO1" at 2759,1570 h30
  text "COAX" at 3389,1570 h30
  text "GPIO2" at 2759,1525 h30
  text "V1P2" at 1294,1500 h30
  text "GPIO3" at 2759,1485 h30
  text "D" at 2774,1155 h30
  text "V3P3" at 1354,1110 h30
  text "C" at 2479,1055 h30
  text "1" at 3284,660 h30
  text "0" at 3504,660 h30
  text "0" at 1209,285 h30
  text "1" at 1209,135 h30
Bottom Overlay:
  lines w10: 1489,875 1489,1030 1749,1290 3109,1290 3109,875 1489,875
  text "Featherscope DAQ v0.1" at 2889,1720 h60
  text "Joe Scherrer" at 2889,1635 h60
  text "Fee Lab, 2019" at 2889,1550 h60
  text "PMODE[2:0]" at 2454,1245 h30
  text "K3 : PMODE_2" at 2909,1210 h30
  text "F00 : Sync ADMux" at 2364,1200 h30
  text "F01 : Async ADMux" at 2364,1155 h30
  text "F11 : USB Boot" at 2364,1105 h30
  text "K2 : PMODE_1" at 2909,1080 h30
  text "F0F : Async SRAM" at 2365.11,1055 h30
  text "F1F : I2C, On Failure USB Boot" at 2364,1006.67 h30
  text "1FF : I2C Only" at 2364,953.33 h30
  text "K1 : PMODE_0" at 2909,950 h30
  text "0F1 : SPI, On Failure USB Boot" at 2364,900 h30
Mechanical 2:
  lines w0: 2026,2250 3609,2250 ; 2174.51,2250 509,2250 ; 509,0 509,0 ; 509,0 509,2250 ; 509,0 3609,0 ; 509,0 509,0 ; 509,2250 509,2250 ; 3609,0 3609,2250 ; 3609,0 3609,0 ; 3609,2250 3609,2250

## Dimensions
-3,0.61 to -3,2255.61 on Mechanical 1
0,0 to 3614,0 on Mechanical 1